# Altium PCB PCB1.PcbDoc
Units mil, origin at the board's own origin, x right, y up, seen from the top; angles counter-clockwise.
Board outline 6000 x 4000 mil, 2 copper layers (Top Layer, Bottom Layer); 64 components, 70 nets, 259 pads, 0 vias.
Unrouted connection lines stored in the file: 151.
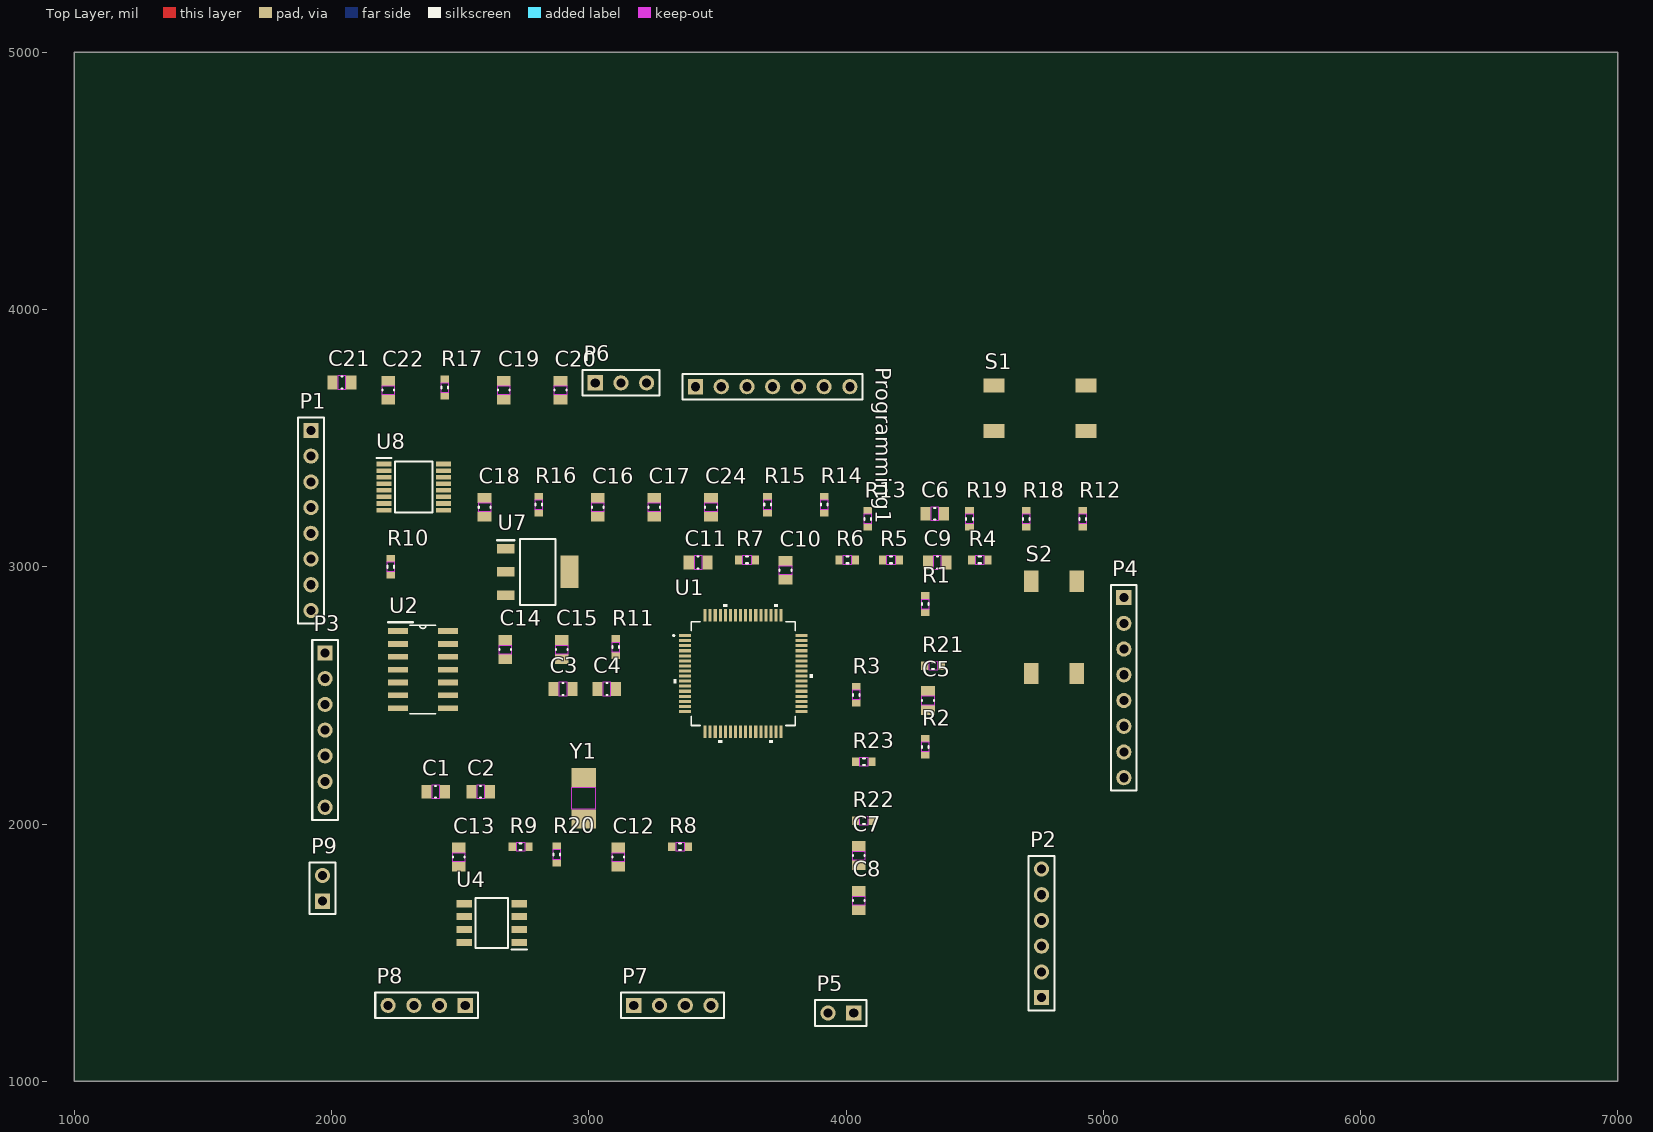
[diagram p0: Top Layer view]
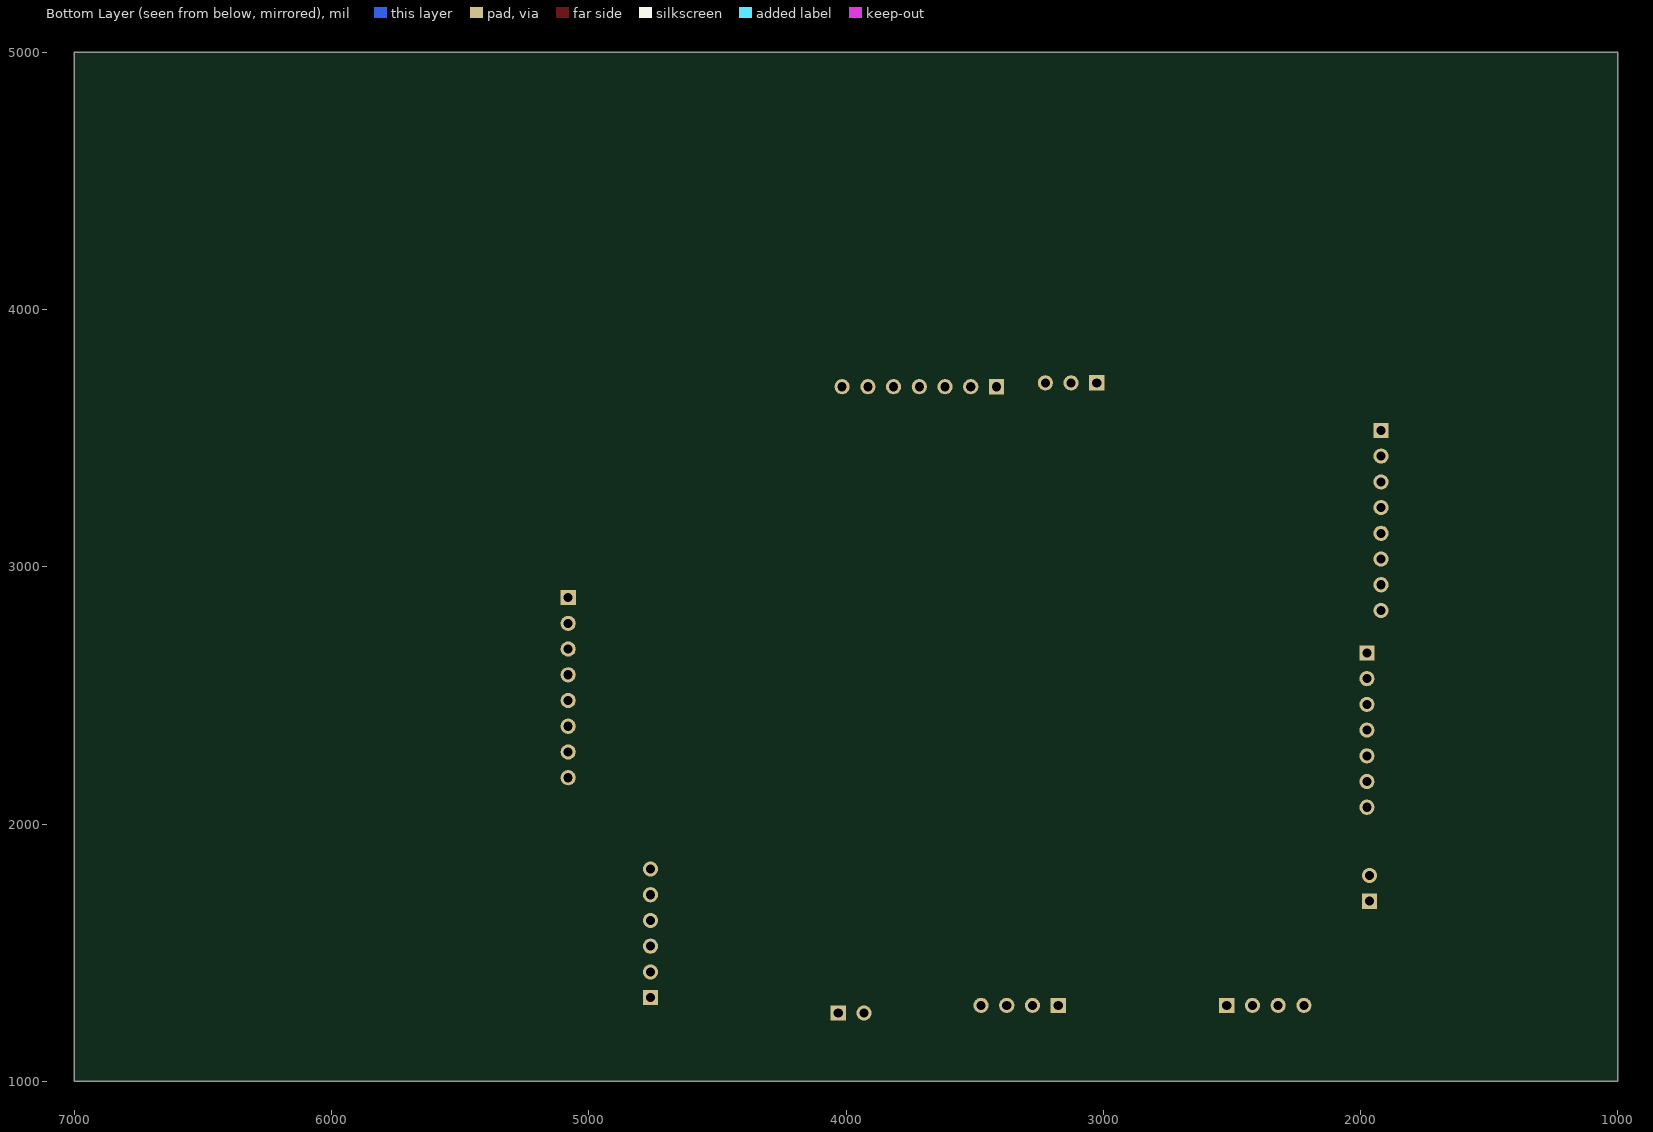
[diagram p1: Bottom Layer view, seen from below]

## Layer stack, top to bottom
Top Solder: solder mask 0.4, Solder Resist, Dk 3.5
Top Layer: signal copper 1.4
Dielectric 1: dielectric 12.6, FR-4, Dk 4.8
Bottom Layer: signal copper 1.4
Bottom Solder: solder mask 0.4, Solder Resist, Dk 3.5

## Board outline
1000,1000 7000,1000 7000,5000 1000,5000

## Design rules (kind name [scope] priority, off if disabled: settings)
Clearance [All] p1: gap=10 ignorepadtopadclearanceinfootprint=FALSE except(0: Arc-Hole Track-Hole SMDPad-Hole THPad-Hole Via-Hole Fill-Hole Poly-Hole Region-Hole Text-Hole)
PolygonConnect [All] p1: connectstyle=Relief reliefconductorwidth=10 reliefentries=4 polygonreliefangle="90 Angle" airgapwidth=10
RoutingVias [All] p1: holewidth=28 width=50 viastyle="Through Hole" minholewidth=28 minwidth=50 maxholewidth=28 maxwidth=50
SolderMaskExpansion [All] p1: expansion=4 istentingtop=FALSE
Width [All] p1: maxlimit=10 minlimit=10 preferedwidth=10
30 further rules are at their usual default settings.

## Classes and differential pairs
component class Peripherals: C5 C6 C7 C8 C9 C10 C11 C12 C13 C14 C15 C16 C17 C18 C19 C20 C21 C22 C24 LED1 R1 R2 R3 R4 R5 R6 R7 R8 R9 R10 R11 R12 R13 R14 R15 R16 R17 R18 R19 R20 R21 R22 R23 S1 S2 U2 U3 U4 U5 U6 U7 U8
component class Main_Sheet: C1 C2 C3 C4 P1 P2 P3 P4 P5 P6 P7 P8 P9 Programming1 U1 Y1

## Components (designator, comment, footprint, x,y, rotation, side; value= is the part's Value field where it differs from the comment)
C1 "Capacitor - Nonpolarized" "0805 - Capacitor" 2405,2125 r0 top value=2.2uF
C2 "Capacitor - Nonpolarized" "0805 - Capacitor" 2580,2125 r0 top value=2.2uF
C3 "100V" "0805 - Capacitor" 2900,2525 r0 top value=27pF
C4 "100V" "0805 - Capacitor" 3070,2525 r0 top value=27pF
C5 "10V" "0805 - Capacitor" 4318.58,2480 r90 top value=10nF
C6 "Capacitor - Nonpolarized" "0805 - Capacitor" 4345,3206.42 r0 top value=100nF
C7 "Capacitor - Nonpolarized" "0805 - Capacitor" 4049.25,1877.28 r90 top value=47nF
C8 "100V" "0805 - Capacitor" 4049.25,1702.28 r90 top value=1uF
C9 "100V" "0805 - Capacitor" 4355,3016.42 r0 top value=0.1uF
C10 "100V" "0805 - Capacitor" 3765,2986.42 r90 top value=0.1uF
C11 "Capacitor - Nonpolarized" "0805 - Capacitor" 3425,3016.42 r0 top value=47nF
C12 "100V" "0805 - Capacitor" 3115,1871.42 r90 top value=0.1uF
C13 "100V" "0805 - Capacitor" 2495,1871.42 r90 top value=0.1uF
C14 "Capacitor - Nonpolarized" "0805 - Capacitor" 2675,2677.72 r90 top value=47nF
C15 "Capacitor - Nonpolarized" "0805 - Capacitor" 2895,2677.72 r90 top value=100nF
C16 "Capacitor - Nonpolarized" "0805 - Capacitor" 3035,3231.42 r90 top value=47nF
C17 "100V" "0805 - Capacitor" 3255,3231.42 r90 top value=0.1uF
C18 "Capacitor - Nonpolarized" "0805 - Capacitor" 2595,3231.42 r90 top value=0.1uF
C19 "Capacitor - Nonpolarized" "0805 - Capacitor" 2670,3686.42 r90 top value=10uF
C20 "Capacitor - Nonpolarized" "0805 - Capacitor" 2890,3686.42 r90 top value=10uF
C21 "Capacitor - Nonpolarized" "0805 - Capacitor" 2040,3716.42 r0 top value=0.1uF
C22 "Capacitor - Nonpolarized" "0805 - Capacitor" 2220,3686.42 r90 top value=0.1uF
C24 "100V" "0805 - Capacitor" 3475,3231.42 r90 top value=0.1uF
P1 "1x8 Header" HDR1X8 1920,3530 r270 top
P2 "1x6 Header" HDR1X6 4760,1325 r90 top
P3 "1x7 Header" HDR1X7 1975,2665 r270 top
P4 "1x8 Header" HDR1X8 5080,2880 r270 top
P5 "1x2 Header" HDR1X2 4030,1265 r180 top
P6 "1x3 Header" HDR1X3 3025,3715 r0 top
P7 "1x4 Header" HDR1X4 3175,1295 r0 top
P8 "1x4 Header" HDR1X4 2520,1295 r180 top
P9 "1x2 Header" HDR1X2 1965,1700 r90 top
Programming1 "Programming" HDR1X7 3415,3700 r0 top
R1 "Resistor" "0603 - Resistor" 4308.58,2855 r90 top value=500m
R2 "Resistor" "0603 - Resistor" 4308.58,2300 r90 top value=500m
R3 "Resistor" "0603 - Resistor" 4039.25,2502.28 r90 top value=500m
R4 "Resistor" "0603 - Resistor" 4520,3026.42 r0 top value=500m
R5 "Resistor" "0603 - Resistor" 4175,3026.42 r0 top value=500m
R6 "Resistor" "0603 - Resistor" 4005,3026.42 r0 top value=500m
R7 "Resistor" "0603 - Resistor" 3615,3026.42 r0 top value=500m
R8 "Resistor" "0603 - Resistor" 3355,1911.42 r0 top value=500m
R9 "Resistor" "0603 - Resistor" 2735,1911.42 r0 top value=500m
R10 "Resistor" "0603 - Resistor" 2230,3000 r90 top value=500m
R11 "Resistor" "0603 - Resistor" 3105,2687.72 r90 top value=500m
R12 "Resistor" "0603 - Resistor" 4920,3186.42 r90 top value=500m
R13 "Resistor" "0603 - Resistor" 4085,3186.42 r90 top value=500m
R14 "Resistor" "0603 - Resistor" 3915,3241.42 r90 top value=500m
R15 "Resistor" "0603 - Resistor" 3695,3241.42 r90 top value=500m
R16 "Resistor" "0603 - Resistor" 2805,3241.42 r90 top value=500m
R17 "Resistor" "0603 - Resistor" 2440,3696.42 r90 top value=100
R18 "10k" "0603 - Resistor" 4700,3186.42 r90 top
R19 "10k" "0603 - Resistor" 4480,3186.42 r90 top
R20 "10k" "0603 - Resistor" 2875,1881.42 r90 top value=120
R21 "10k" "0603 - Resistor" 4338.58,2615 r180 top value=120
R22 "10k" "0603 - Resistor" 4069.25,2012.28 r180 top value=120
R23 "10k" "0603 - Resistor" 4069.25,2242.28 r180 top value=120
S1 "Switch - Push Button" "6x6mm Switch" 4754.13,3616.42 r180 top
S2 "Switch - Push Button" "6x6mm Switch" 4808.58,2764.13 r90 top
U1 "STM32G431RBT6" LQFP64-10x10mm 3600,2585 r0 top
U2 "LM324AMX/NOPB" LM324AMX/NOPB 2355,2600 r0 top
U4 "TJA1051T_3,118" TJA1051T/3,118 2622.72,1615 r180 top
U7 "TLV1117-33IDCYR" TLV1117 2800.98,2980 r0 top
U8 "NX3L4051PW,118" SOP65P640X120-16N 2320,3310 r0 top
Y1 "Oscillator" "2-SMD NO LEAD CRSYSTAL" 2980,2100 r90 top value=16MHz

## Footprints (in the part's own frame and the unit in brackets; to place one, negate y for a bottom-side part, rotate by r counter-clockwise, add the part's x,y. Pads: shape width x height; smd on the part's side, far side on the other; paste and mask are expansions set on the pad)
"2-SMD NO LEAD CRSYSTAL" [mm]
  rect 1.9x2.4 smd: 1(-2.05,0) 2(2.05,0)
  Top Layer keep-out region: -1.05,1.2 -1.05,-1.2 1.05,-1.2 1.05,1.2
  body extent -2.5,-1.6 2.5,1.6, height 1.3
"6x6mm Switch" [mm]
  rect 2.1x1.4 smd: 1(-4.55,2.25) 1(4.55,2.25) 2(-4.55,-2.25) 2(4.55,-2.25)
  body extent -5,-3 5,3, height 5.12
"0603 - Resistor" [mm] "0603 Chip Resistor - IPC Medium Density"
  rect 0.7x0.85 smd: 1(-0.825,0) 2(0.825,0)
  Top Layer keep-out region: -0.45,0.4 -0.45,-0.4 0.45,-0.4 0.45,0.4
  silkscreen extent -0.1,-0.33 0.1,0.33, body extent -0.8,-0.4 0.8,0.4, height 0.45
"0805 - Capacitor" [mm] "0805 Chip Capacitor - IPC Medium Density"
  rect 1x1.35 smd: 1(-0.925,0) 2(0.925,0)
  Top Layer keep-out region: -0.4,0.65 -0.4,-0.65 0.4,-0.65 0.4,0.65
  silkscreen extent -0.05,-0.58 0.05,0.58, body extent -1,-0.6 1,0.6, height 1.2
HDR1X2 [mm] "Connector; Header; 2 Position"
  rect 1.5x1.5 hole 0.9: 1(0,0)
  round 1.5 hole 0.9: 2(2.54,0)
  silkscreen extent -1.27,-1.27 3.81,1.27, body extent -1.27,-1.27 3.81,1.27, height 8.54
HDR1X3 [mm] "Connector; Header; 3 Position"
  rect 1.5x1.5 hole 0.9: 1(0,0)
  round 1.5 hole 0.9: 2(2.54,0) 3(5.08,0)
  silkscreen extent -1.27,-1.27 6.35,1.27, body extent -1.27,-1.27 6.35,1.27, height 8.54
HDR1X4 [mm] "Connector; Header; 4 Position"
  rect 1.5x1.5 hole 0.9: 1(0,0)
  round 1.5 hole 0.9: 2(2.54,0) 3(5.08,0) 4(7.62,0)
  silkscreen extent -1.27,-1.27 8.89,1.27, body extent -1.27,-1.27 8.89,1.27, height 8.54
HDR1X6 [mm] "Connector; Header; 6 Position"
  rect 1.5x1.5 hole 0.9: 1(0,0)
  round 1.5 hole 0.9: 2(2.54,0) 3(5.08,0) 4(7.62,0) 5(10.16,0) 6(12.7,0)
  silkscreen extent -1.27,-1.27 13.97,1.27, body extent -1.27,-1.27 13.97,1.27, height 8.54
HDR1X7 [mm] "Connector; Header; 7 Position"
  rect 1.5x1.5 hole 0.9: 1(0,0)
  round 1.5 hole 0.9: 2(2.54,0) 3(5.08,0) 4(7.62,0) 5(10.16,0) 6(12.7,0) 7(15.24,0)
  silkscreen extent -1.27,-1.27 16.51,1.27, body extent -1.27,-1.27 16.51,1.27, height 8.54
HDR1X8 [mm] "Connector; Header; 8 Position"
  rect 1.5x1.5 hole 0.9: 1(0,0)
  round 1.5 hole 0.9: 2(2.54,0) 3(5.08,0) 4(7.62,0) 5(10.16,0) 6(12.7,0) 7(15.24,0) 8(17.78,0)
  silkscreen extent -1.27,-1.27 19.05,1.27, body extent -1.27,-1.27 19.05,1.27, height 8.54
LM324AMX/NOPB [mil] "Gen Purp 4Ch Opamp"
  rect 78x22 smd: 1(-97,150) 2(-97,100) 3(-97,50) 4(-97,0) 5(-97,-50) 6(-97,-100) 7(-97,-150) 8(97,-150) 9(97,-100) 10(97,-50) 11(97,0) 12(97,50) 13(97,100) 14(97,150)
  silkscreen extent -135,-172 51,185, body extent -122,-172 122,172, height 69
LQFP64-10x10mm [mil] "STM32G431RBT6 MCU"
  rect 47x12 smd paste+0 mask+0: 1(-226.38,147.64) 2(-226.38,127.95) 3(-226.38,108.27) 4(-226.38,88.58) 5(-226.38,68.9) 6(-226.38,49.21) 7(-226.38,29.53) 8(-226.38,9.84) 9(-226.38,-9.84) 10(-226.38,-29.53) 11(-226.38,-49.21) 12(-226.38,-68.9) 13(-226.38,-88.58) 14(-226.38,-108.27) 15(-226.38,-127.95) 16(-226.38,-147.64) 33(226.38,-147.64) 34(226.38,-127.95) 35(226.38,-108.27) 36(226.38,-88.58) 37(226.38,-68.9) 38(226.38,-49.21) 39(226.38,-29.53) 40(226.38,-9.84) 41(226.38,9.84) 42(226.38,29.53) 43(226.38,49.21) 44(226.38,68.9) 45(226.38,88.58) 46(226.38,108.27) 47(226.38,127.95) 48(226.38,147.64)
  rect 12x47 smd paste+0 mask+0: 17(-147.64,-226.38) 18(-127.95,-226.38) 19(-108.27,-226.38) 20(-88.58,-226.38) 21(-68.9,-226.38) 22(-49.21,-226.38) 23(-29.53,-226.38) 24(-9.84,-226.38) 25(9.84,-226.38) 26(29.53,-226.38) 27(49.21,-226.38) 28(68.9,-226.38) 29(88.58,-226.38) 30(108.27,-226.38) 31(127.95,-226.38) 32(147.64,-226.38) 49(147.64,226.38) 50(127.95,226.38) 51(108.27,226.38) 52(88.58,226.38) 53(68.9,226.38) 54(49.21,226.38) 55(29.53,226.38) 56(9.84,226.38) 57(-9.84,226.38) 58(-29.53,226.38) 59(-49.21,226.38) 60(-68.9,226.38) 61(-88.58,226.38) 62(-108.27,226.38) 63(-127.95,226.38) 64(-147.64,226.38)
  silkscreen extent -273,-270 270,270, body extent -236,-236 236,236, height 63
SOP65P640X120-16N [mm]
  rect 1.475x0.45 smd mask+0.07: 1(-2.938,2.275) 2(-2.938,1.625) 3(-2.938,0.975) 4(-2.938,0.325) 5(-2.938,-0.325) 6(-2.938,-0.975) 7(-2.938,-1.625) 8(-2.938,-2.275) 9(2.938,-2.275) 10(2.938,-1.625) 11(2.938,-0.975) 12(2.938,-0.325) 13(2.938,0.325) 14(2.938,0.975) 15(2.938,1.625) 16(2.938,2.275)
  silkscreen extent -3.67,-2.5 1.85,2.85, body extent -3.2,-2.5 3.2,2.5, height 1.2
TJA1051T/3,118 [mm] "SOIC127P600X175-8N"
  rect 1.55x0.7 smd: 1(-2.725,1.905) 2(-2.725,0.635) 3(-2.725,-0.635) 4(-2.725,-1.905) 5(2.725,-1.905) 6(2.725,-0.635) 7(2.725,0.635) 8(2.725,1.905)
  silkscreen extent -3.5,-2.45 1.6,2.61, body extent -3,-2.45 3,2.45, height 1.75
TLV1117 [mm] "SOT230P700X180-4N"
  rect 1.75x0.95 smd: 1(-3.15,2.3) 2(-3.15,0) 3(-3.15,-2.3)
  rect 1.75x3.2 smd: 2(3.15,0)
  silkscreen extent -4.03,-3.25 1.75,3.25, body extent -3.5,-3.25 3.5,3.25, height 1.8

## Part data
C1 C2 C6 C15: "Nonpolarized Capacitor", Supplier Part Number=311-3420-1-ND
C3 C4: library part "Capacitor - Nonpolarized", "Nonpolarized Capacitor", Supplier Part Number=311-1104-1-ND
C5: library part "Capacitor - Nonpolarized", "Nonpolarized Capacitor", Supplier Part Number=311-1475-1-ND
C7 C11 C14 C16: "Nonpolarized Capacitor", Supplier Part Number=311-1431-1-ND
C8: library part "Capacitor - Nonpolarized", "Nonpolarized Capacitor", Supplier Part Number=311-1456-1-ND
C9 C10 C12 C13 C17 C24: library part "Capacitor - Nonpolarized", "Nonpolarized Capacitor", Supplier Part Number=311-1141-1-ND
C18 C21 C22: "Nonpolarized Capacitor", Supplier Part Number=311-1141-1-ND
C19 C20: "Nonpolarized Capacitor", Supplier Part Number=13-CC0805KFX7R6BB106CT-ND
P1 P4: "1x8 Pin Header"
P2: "1x6 Pin Header"
P3: "1x7 Pin Header"
P5 P9: "1x2 Pin Header"
P6: "1x3 Pin Header"
P7 P8: "1x4 Pin Header"
Programming1: library part "1x7 Header", "1x7 Pin Header"
R1 R2 R3 R4 R5 R6 R7 R8 R9 R10 R11 R12 R13 R14 R15 R16: Supplier Part Number=13-RL0603JR-070R5LCT-ND
R17: Supplier Part Number=311-100HRCT-ND
R18 R19 R20 R21 R22 R23: library part Resistor, "Resistor", Supplier Part Number=311-10.0KHRCT-ND
S1 S2: "Push Button Switch"
U1: "No Description Available", Mfr_Name=STMicroelectronics, Copyright="Copyright (C) 2022 Ultra Librarian. All rights reserved.", Manufacturer_Part_Number=STM32G431RBT6, RefDes=RefDes, Type=DEV
U2: "Gen Purp 4Ch Opamp", Manufacturer=TI, Supplier Part Number=LM324AMX/NOPBCT-ND, ComponentLink1Description=Datasheet, ComponentLink1URL=https://www.ti.com/lit/ds/symlink/lm124-n.pdf?HQS=dis-dk-null-digikeymode-dsf-pf-null-wwe&ts=1616555832552, Manufacturer Part Number=LM324AMX/NOPB, Supplier=Digikey
U4: "CAN Transceiver IC 4.5V-5.5V 250ns", Manufacturer=NXP, Manufacturer Part Number=TJA1051T/3,118, Supplier Part Number=568-8684-1-ND, ComponentLink1Description=Datasheet, ComponentLink1URL=http://www.nxp.com/docs/en/data-sheet/TJA1051.pdf, Supplier=Digikey
U7: "Linear Voltage Regulator IC 3.3V 800MA SOT223-4", Manufacturer="Texas Instruments", Supplier Part Number=296-21112-1-ND, ComponentLink1Description=Datasheet, ComponentLink1URL=http://www.ti.com/lit/ds/symlink/tlv1117.pdf?HQS=TI-null-null-digikeymode-df-pf-null-wwe&ts=1590668900314, Manufacturer Part Number=TLV1117-33IDCYR, Supplier=Digikey
U8: "8:1 MUX", Manufacturer=NXP, Supplier Part Number=568-12393-1-ND, ComponentLink1Description=Datsheet, ComponentLink1URL=https://www.nxp.com/docs/en/data-sheet/NX3L4051.pdf, Manufacturer Part Number=NX3L4051PW,118, Supplier=Digikey
Y1: "Crystal Oscillator", Supplier Part Number=535-13460-1-ND

## Nets (pads, with @x,y where several pads share a name; then routed paths per layer and width w, separated by ;. In a path a pad name is that pad's centre, name@x,y a point inside that pad or via, vN(x,y) a via of type N, cw(c..) or ccw(c..) an arc to the next point about the centre after c; other vN are vias at no path point)
3.3V: 
3V3: C5.1 C8.1 C9.1 C10.1 C12.1 C13.1 C15.2 C18.1 C20.2 C21.1 P9.1 Programming1.6 R18.1 R19.1 U2.4 U4.5 U7.2 U8.16
5V: C6.2 C19.2 P5.1 P7.1 U4.3 U7.3
ADC1: P4.1
ADC2: P4.2
ADC3: P4.3
ADC_TEMP: C22.2 P4.4 R17.1 U1.8
ADC_VA: C7.2 R3.2 U1.12
ADC_VB: C11.2 R7.2 U1.13
ADC_VC: C14.2 R11.2 U1.14
ADC_VDC: C16.2 R15.2 U1.17
CAN_H: P8.4 R20.2 U4.7
CAN_L: P8.3 R20.1 U4.6
CAN_RX: P8.2 U1.45 U4.4
CAN_TX: P8.1 U1.46 U4.1
CS_DRIVER: P4.7 U1.40
EN_DRIVER: P4.6 U1.41
GND: C1.1 C2.2 C3.2 C4.2 C5.2 C6.1 C7.1 C8.2 C9.2 C10.2 C11.1 C12.2 C13.2 C14.1 C15.1 C16.1 C17.2 C18.2 C19.1 C20.1 C21.2 C22.1 C24.2 P5.2 P7.2 P9.2 Programming1.7 R4.1 R8.1 R12.1 R16.1 S1.2 S2.2 U2.11 U4.2 U4.8 U7.1 U8.6 U8.8
GPIO1: U1.5 U8.11
GPIO2: U1.2 U8.10
GPIO3: U1.3 U8.9
GPIO4: C24.1 R18.2 S2.1 U1.4
INHA: P2.1 U1.42
INHB: P2.3 U1.43
INHC: P2.5 U1.44
INLA: P2.2 U1.21
INLB: P2.4 U1.24
INLC: P2.6 U1.25
ISENA: P3.5 U1.9
ISENB: P3.6 U1.10
ISENC: P3.7 U1.11
LED_B: R23.1 U1.20
LED_G: R22.2 U1.19
LED_R: R21.2 U1.18
MISO: P6.2 U1.57
MOSI: P6.1 U1.58
NetC3_1: C3.1 Y1.1
NetC4_1: C4.1 Y1.2
NetLED1_1: R23.2
NetLED1_2: R22.1
NetLED1_3: R21.1
NetR1_1: R1.1 R2.2 U2.2
NetR1_2: R1.2 R3.1 U2.1
NetR5_1: R5.1 R6.2 U2.6
NetR5_2: R5.2 R7.1 U2.7
NetR9_1: R9.1 R10.2 U2.9
NetR9_2: R9.2 R11.1 U2.8
NetR13_1: R13.1 R14.2 U2.13
NetR13_2: R13.2 R15.1 U2.14
NetR17_2: R17.2 U8.3
RESET: C17.1 Programming1.1 R19.2 S1.1
SCL: P7.4 U1.51
SCLK: P6.3 U1.56
SDA: P7.3 U1.60
SWCLK: Programming1.4 U1.50
SWDIO: Programming1.5 U1.49
TEMP_1: P1.1 U8.13
TEMP_2: P1.2 U8.14
TEMP_3: P1.3 U8.15
TEMP_4: P1.4 U8.12
TEMP_5: P1.5 U8.1
TEMP_6: P1.6 U8.5
TEMP_7: P1.7 U8.2
TEMP_8: P1.8 U8.4
UART_RX: Programming1.2 U1.53
UART_TX: Programming1.3 U1.52
VSENSE_A: P3.1 R4.2 U2.3
VSENSE_B: P3.2 R8.2 U2.5
VSENSE_C: P3.3 R12.2 U2.10
VSENSE_DC: P3.4 R16.2 U2.12
pads on no net: C1.2 C2.1 P4.5 P4.8 R2.1 R6.1 R10.1 R14.1 U1.1 U1.6 U1.7 U1.15 U1.16 U1.22 U1.23 U1.26 U1.27 U1.28 U1.29 U1.30 U1.31 U1.32 U1.33 U1.34 U1.35 U1.36 U1.37 U1.38 U1.39 U1.47 U1.48 U1.54 U1.55 U1.59 U1.61 U1.62 U1.63 U1.64 U8.7